# Altium PCB PCB.PcbDoc
Units mm, origin at the board's own origin, x right, y up, seen from the top; angles counter-clockwise.
Board outline 52.5 x 37.5 mm, 2 copper layers (Top Layer, Bottom Layer); 7 components, 16 nets, 45 pads, 0 vias.
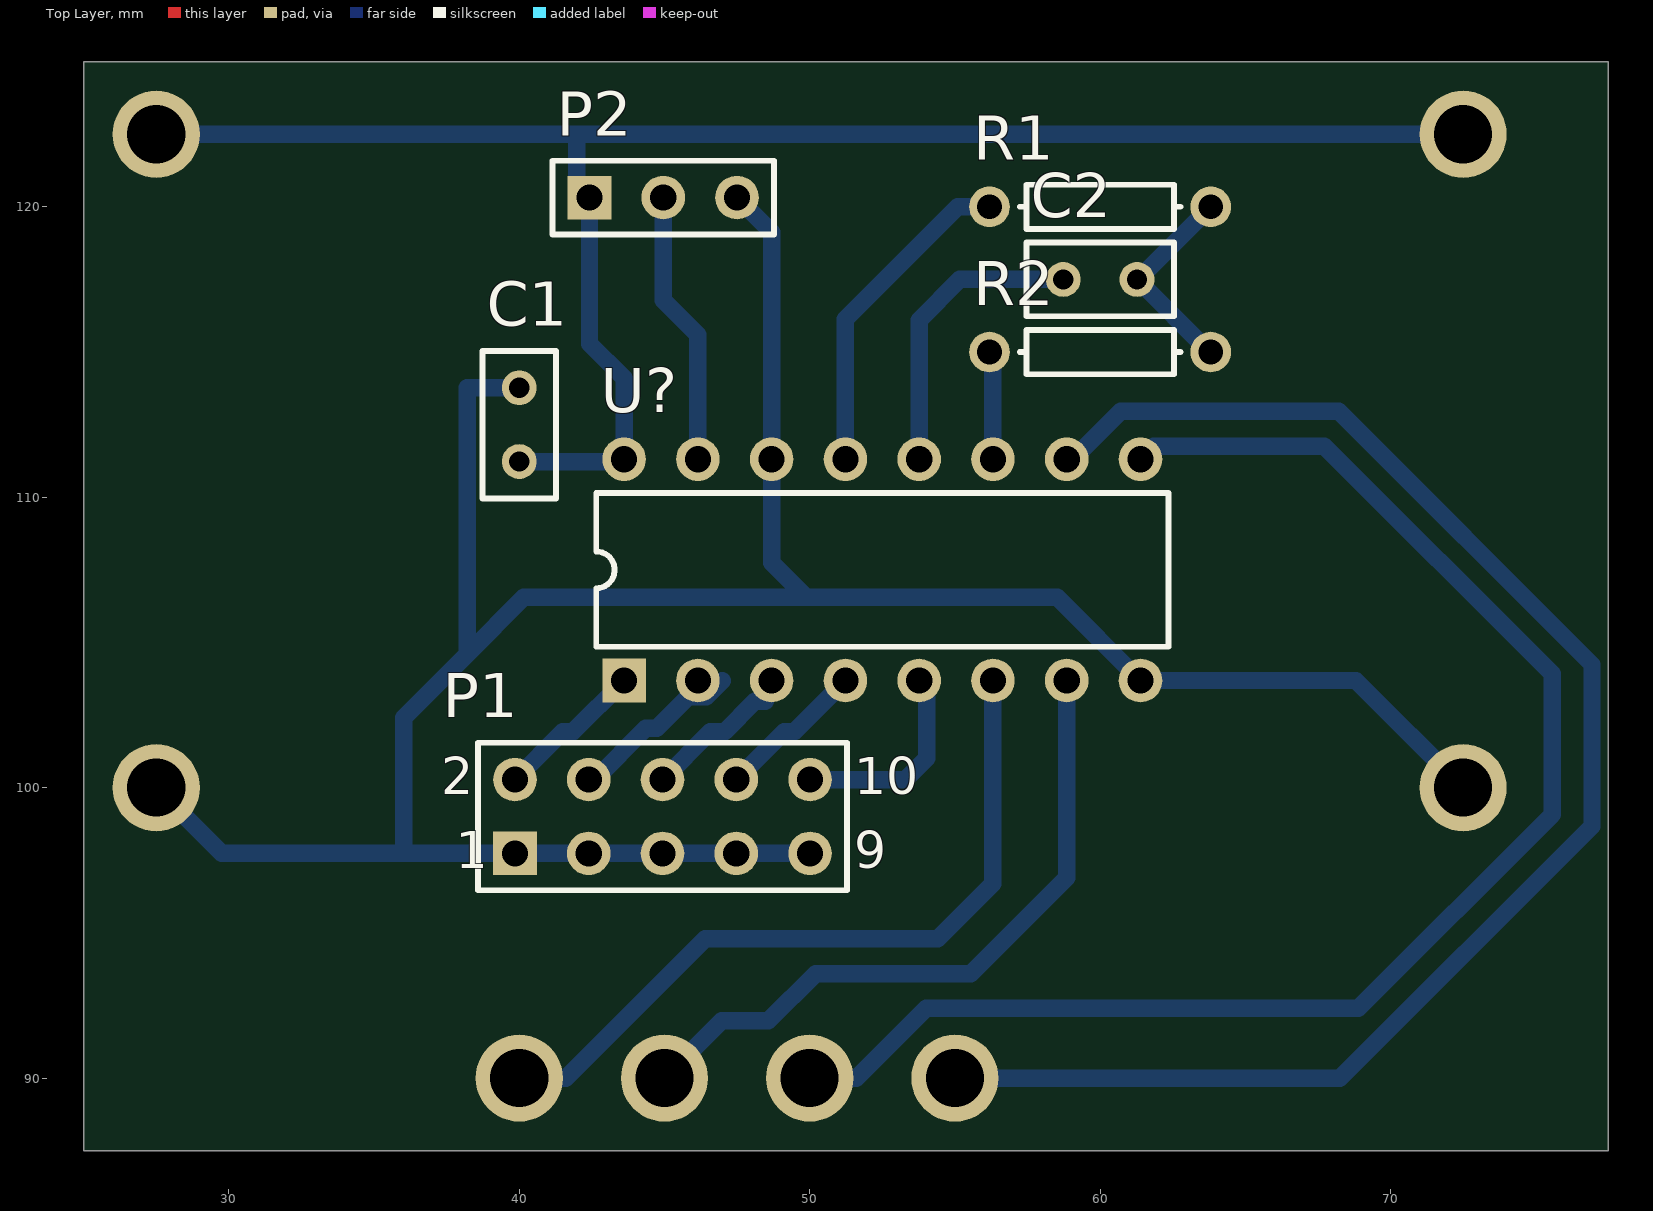
[diagram p0: Top Layer view]
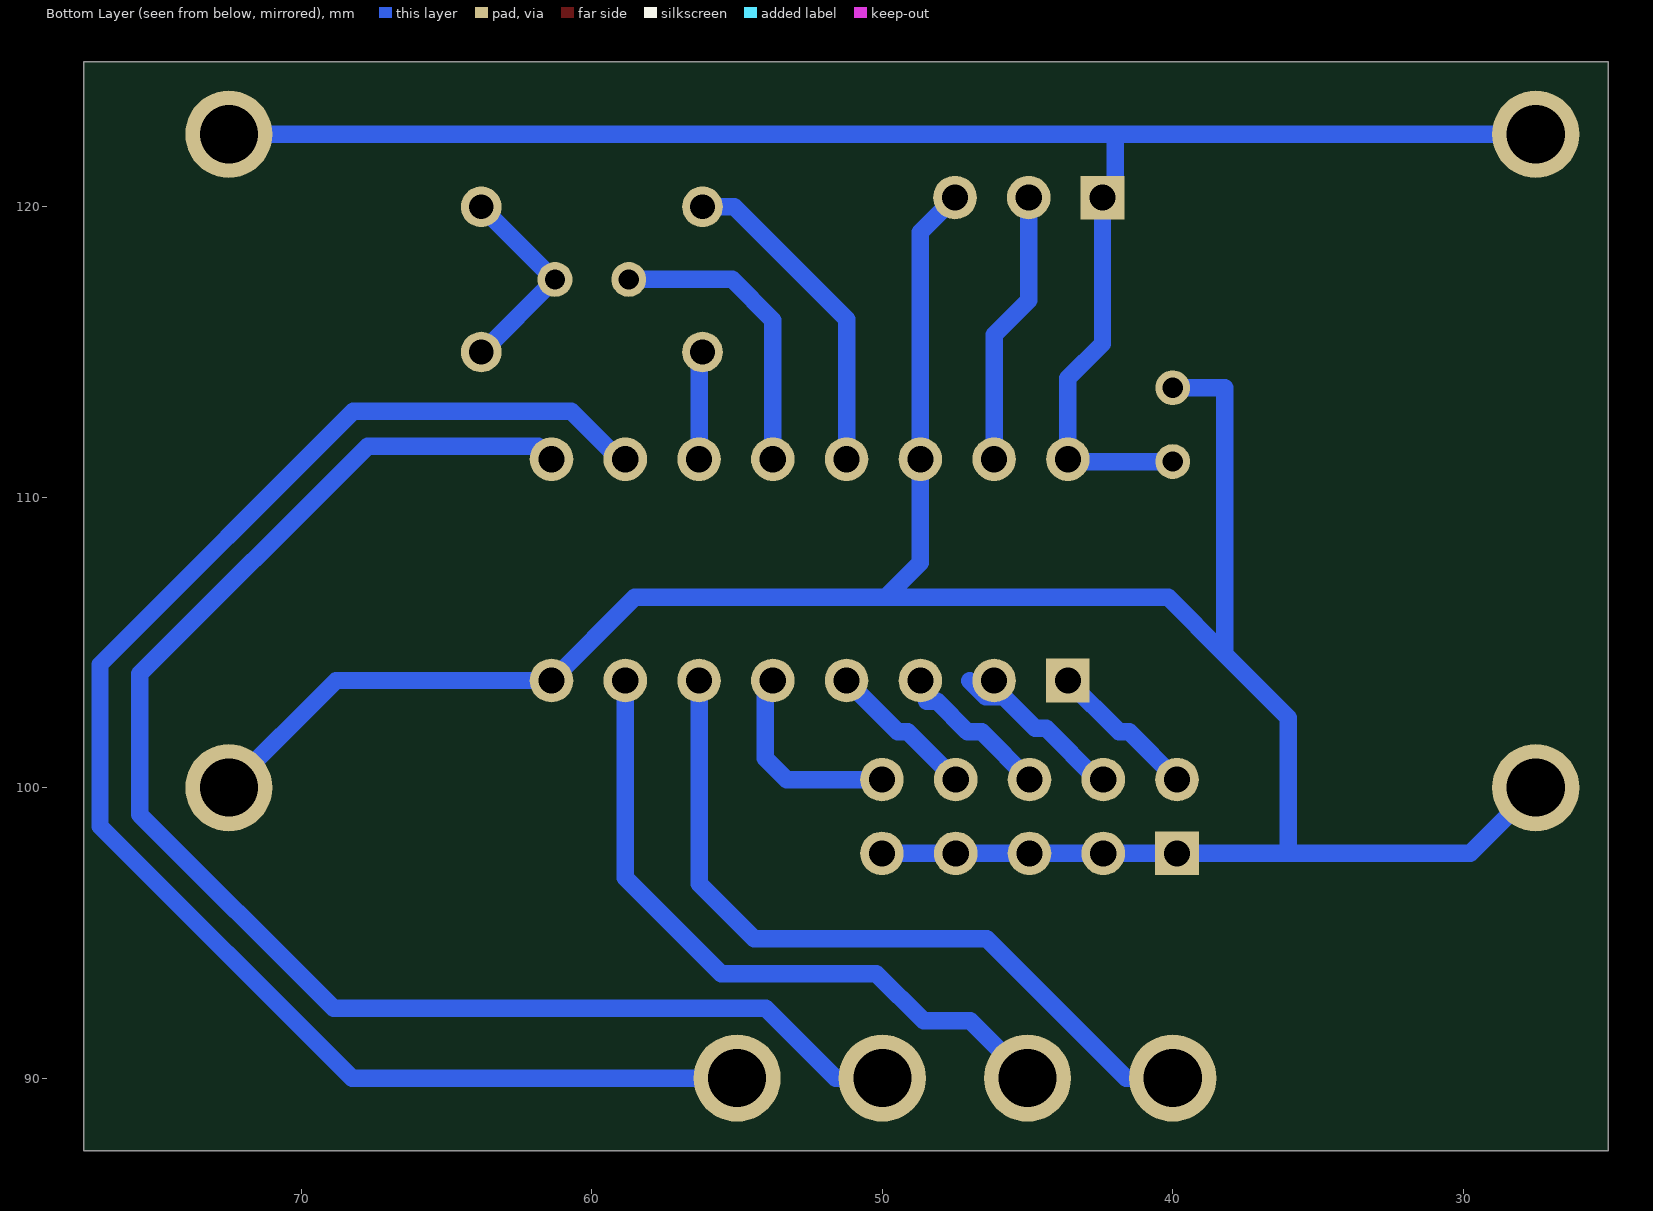
[diagram p1: Bottom Layer view, seen from below]

## Layer stack, top to bottom
Top Layer: signal copper 0.0356
Dielectric: dielectric 0.32, FR-4, Dk 4.8
Bottom Layer: signal copper 0.0356

## Board outline
25,87.5 77.5,87.5 77.5,125 25,125

## Design rules (kind name [scope] priority, off if disabled: settings)
Clearance Clearance_1 [IsRegion] p1: gap=1
Clearance [Not HasFootprint('LED')] p2: gap=0.6
PolygonConnect [All] p1: connectstyle=Relief reliefconductorwidth=0.254 reliefentries=4 polygonreliefangle="90 Angle"
RoutingVias [All] p1: holewidth=0.711 width=1.27 viastyle="Through Hole" minholewidth=0.711 minwidth=1.27 maxholewidth=0.711 maxwidth=1.27
SilkscreenOverComponentPads [All] p1: minsilkscreentomaskgap=0.254
SolderMaskExpansion SolderMaskExpansion_1 [HasFootprint('LED')] p1: expansion=0.15
SolderMaskExpansion [Not HasFootprint('LED')] p2: expansion=0.4
Width [All] p1: maxlimit=2 minlimit=0.6 preferedwidth=0.8
27 further rules are at their usual default settings.

## Components (designator, comment, footprint, x,y, rotation, side; value= is the part's Value field where it differs from the comment)
C1 "Cap" RAD-0.1 40,112.5 r270 top
C2 "Cap" RAD-0.1 60,117.5 r0 top
P1 "Header 5X2" HDR2X5 39.853,97.739 r0 top
P2 "Header 3" HDR1X3 42.418,120.32 r0 top
R1 "Res1" AXIAL-0.3 60,120 r0 top
R2 "Res1" AXIAL-0.3 60,115 r0 top
U? "MC145026P" 648-08 52.5,107.5 r0 top

## Footprints (in the part's own frame and the unit in brackets; to place one, negate y for a bottom-side part, rotate by r counter-clockwise, add the part's x,y. Pads: shape width x height; smd on the part's side, far side on the other; paste and mask are expansions set on the pad)
648-08 [mm] "DIP; 16 Leads; Row Spacing 7.62 mm; Pitch 2.54 mm"
  rect 1.5x1.5 hole 0.9: 1(-8.89,-3.81)
  round 1.5 hole 0.9: 2(-6.35,-3.81) 3(-3.81,-3.81) 4(-1.27,-3.81) 5(1.27,-3.81) 6(3.81,-3.81) 7(6.35,-3.81) 8(8.89,-3.81) 9(8.89,3.81) 10(6.35,3.81) 11(3.81,3.81) 12(1.27,3.81) 13(-1.27,3.81) 14(-3.81,3.81) 15(-6.35,3.81) 16(-8.89,3.81)
  silkscreen extent -9.85,-2.65 9.85,2.65
AXIAL-0.3 [mm] "Axial Device, Thru-Hole; 2 Leads; 0.3 in Pin Spacing"
  round 1.4 hole 0.85: 1(-3.81,0) 2(3.81,0)
  silkscreen extent -2.77,-0.76 2.77,0.76
HDR1X3 [mm] "Connector; Header; 3 Position"
  rect 1.5x1.5 hole 0.9: 1(0,0)
  round 1.5 hole 0.9: 2(2.54,0) 3(5.08,0)
  silkscreen extent -1.27,-1.27 6.35,1.27
HDR2X5 [mm] "Connector; Header; 5x2 Position"
  rect 1.5x1.5 hole 0.9: 1(0,0)
  round 1.5 hole 0.9: 2(0,2.54) 3(2.54,0) 4(2.54,2.54) 5(5.08,0) 6(5.08,2.54) 7(7.62,0) 8(7.62,2.54) 9(10.16,0) 10(10.16,2.54)
  silkscreen extent -1.27,-1.27 11.43,3.81
RAD-0.1 [mm] "Radial Cap, Thru-Hole; 2 Leads; 0.1 in Pin Spacing"
  round 1.2 hole 0.7: 1(-1.27,0) 2(1.27,0)
  silkscreen extent -2.54,-1.27 2.54,1.27

## Part data
C1 C2: "Capacitor"
P1: "Header, 5-Pin, Dual row"
P2: "Header, 3-Pin"
R1 R2: "Resistor"
U?: "Remote Control Encoder"

## Free pads (board coordinates)
  round 3 hole 2: 46(72.5,100) 47(27.5,100) 48(27.5,122.5) 49(72.5,122.5) 50(40,90) 51(45,90) 52(50,90) 53(55,90)

## Nets (pads, with @x,y where several pads share a name; then routed paths per layer and width w, separated by ;. In a path a pad name is that pad's centre, name@x,y a point inside that pad or via, vN(x,y) a via of type N, cw(c..) or ccw(c..) an arc to the next point about the centre after c; other vN are vias at no path point)
GND: C1.1 P1.1 P1.3 P1.5 P1.7 P1.9 P2.3 pad.46 pad.47 U?.8 U?.14 | length 94.8
  Bottom Layer w0.6: pad.47 29.761,97.739 36.017,97.739 ; C1.1 38.205,113.77 38.205,104.601 ; P2.3 48.69,119.128 U?.14 48.69,107.749 49.886,106.553 ; P1.9 P1.7 P1.5 P1.3 P1.1 36.017,97.739 ; pad.46 68.81,103.69 U?.8 58.527,106.553 49.886,106.553 ; 36.017,97.739 36.017,102.413 38.205,104.601 ; 38.205,104.601 40.157,106.553 49.886,106.553
IN1: pad.50 U?.6 | length 26.1
  Bottom Layer w0.6: pad.50 41.606,90 46.406,94.8 54.414,94.8 56.31,96.696 U?.6
IN2: pad.51 U?.7 | length 23.5
  Bottom Layer w0.6: pad.51 46.973,91.973 48.579,91.973 50.206,93.6 55.551,93.6 58.85,96.899 U?.7
IN3: pad.52 U?.9 | length 51.8
  Bottom Layer w0.6: pad.52 51.606,90 54.006,92.4 68.889,92.4 75.565,99.076 75.565,103.916 67.721,111.76 61.84,111.76 U?.9
IN4: pad.53 U?.10 | length 53.5
  Bottom Layer w0.6: pad.53 68.258,90 76.937,98.679 76.937,104.242 68.218,112.96 60.707,112.96 59.057,111.31 U?.10
NetC2_1: C2.1 U?.12 | length 10.3
  Bottom Layer w0.6: U?.12 53.77,116.102 55.168,117.5 C2.1
NetC2_2: C2.2 R1.2 R2.2 | length 7.2
  Bottom Layer w0.6: R2.2 63.77,115 C2.2 61.31,117.5 R1.2
NetP1_2: P1.2 U?.1 | length 5.2
  Bottom Layer w0.6: P1.2 41.503,101.929 41.849,101.929 U?.1
NetP1_4: P1.4 U?.2 | length 6
  Bottom Layer w0.6: P1.4 42.599,100.279 44.36,102.04 44.733,102.04 45.822,103.129 46.436,103.129 46.99,103.683
NetP1_6: P1.6 U?.3 | length 4.6
  Bottom Layer w0.6: P1.6 46.583,101.929 47.068,101.929 48.108,102.969 48.466,102.969
NetP1_8: P1.8 U?.4 | length 5.2
  Bottom Layer w0.6: P1.8 49.123,101.929 49.469,101.929 U?.4
NetP1_10: P1.10 U?.5 | length 7.1
  Bottom Layer w0.6: P1.10 53.289,100.279 54.026,101.016 54.026,103.434 U?.5
NetP2_2: P2.2 U?.15 | length 9.2
  Bottom Layer w0.6: P2.2@44.96,120 44.96,116.787 46.15,115.597 U?.15
NetR1_1: R1.1 U?.13 | length 11.4
  Bottom Layer w0.6: U?.13 51.23,116.127 55.103,120 R1.1
NetR2_1: R2.1 U?.11 | length 3.7
  Bottom Layer w0.6: R2.1 56.31,114.88 U?.11
VCC: C1.2 P2.1 pad.48 pad.49 U?.16 | length 60.5
  Bottom Layer w0.6: pad.48 41.986,122.5 ; C1.2 43.53,111.23 U?.16 43.61,114.099 42.418,115.291 P2.1 41.986,120.752 41.986,122.5 ; pad.49 41.986,122.5

## Text inside footprints (layer, text, board x,y; h text height)
P1: Top Overlay "10" at 51.537,99.771 h1.27; Top Overlay "9" at 51.537,97.231 h1.27; Top Overlay "1" at 37.821,97.231 h1.27; Top Overlay "2" at 37.313,99.771 h1.27